# EAGLE board Project_Tsc v71 (EAGLE 9.7.0)
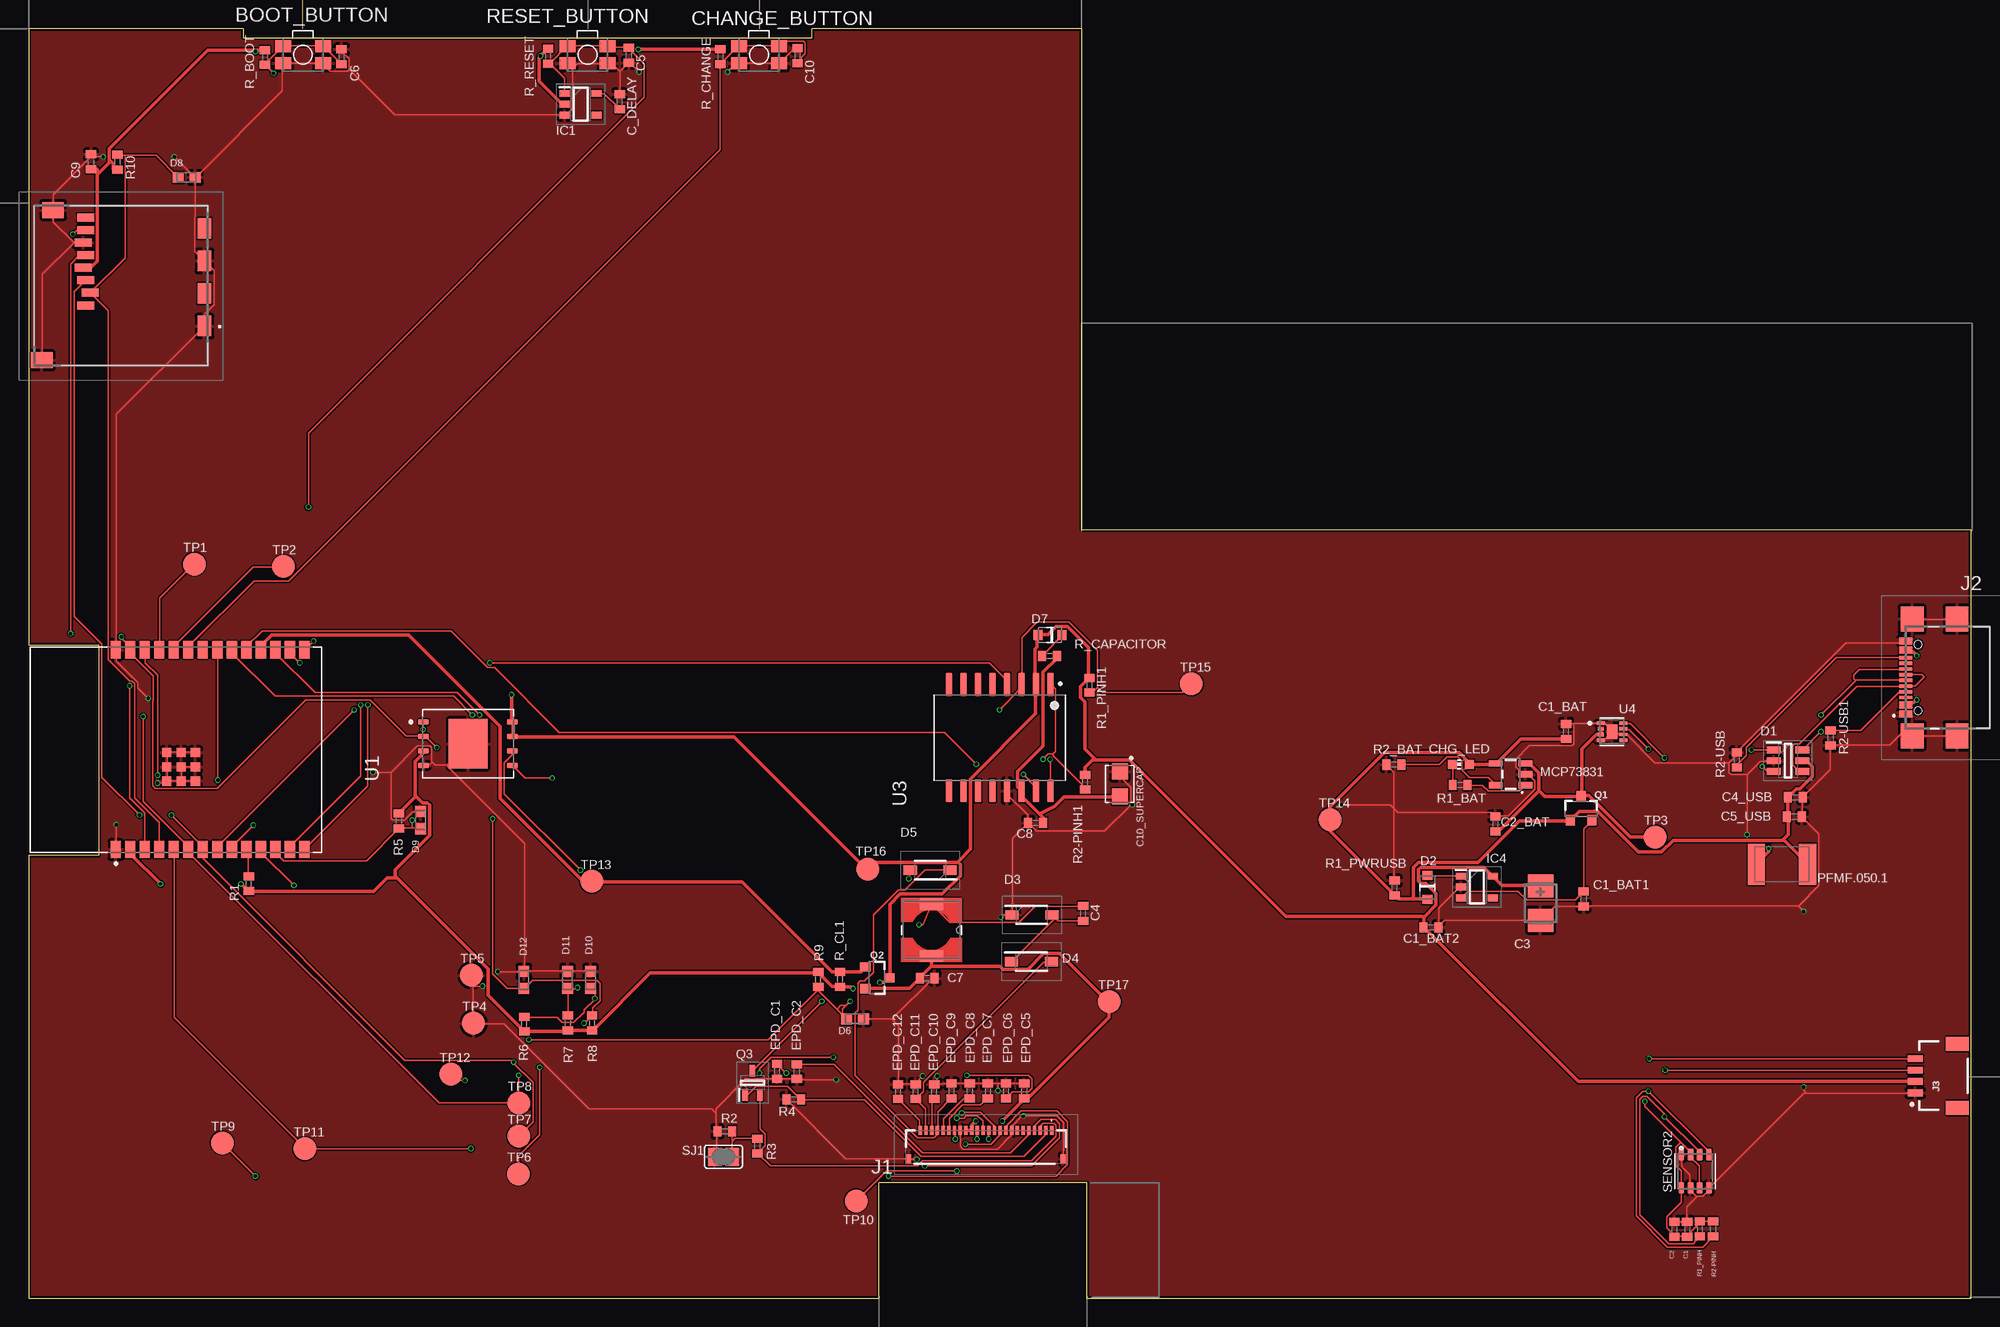
[diagram p0: board, top side]
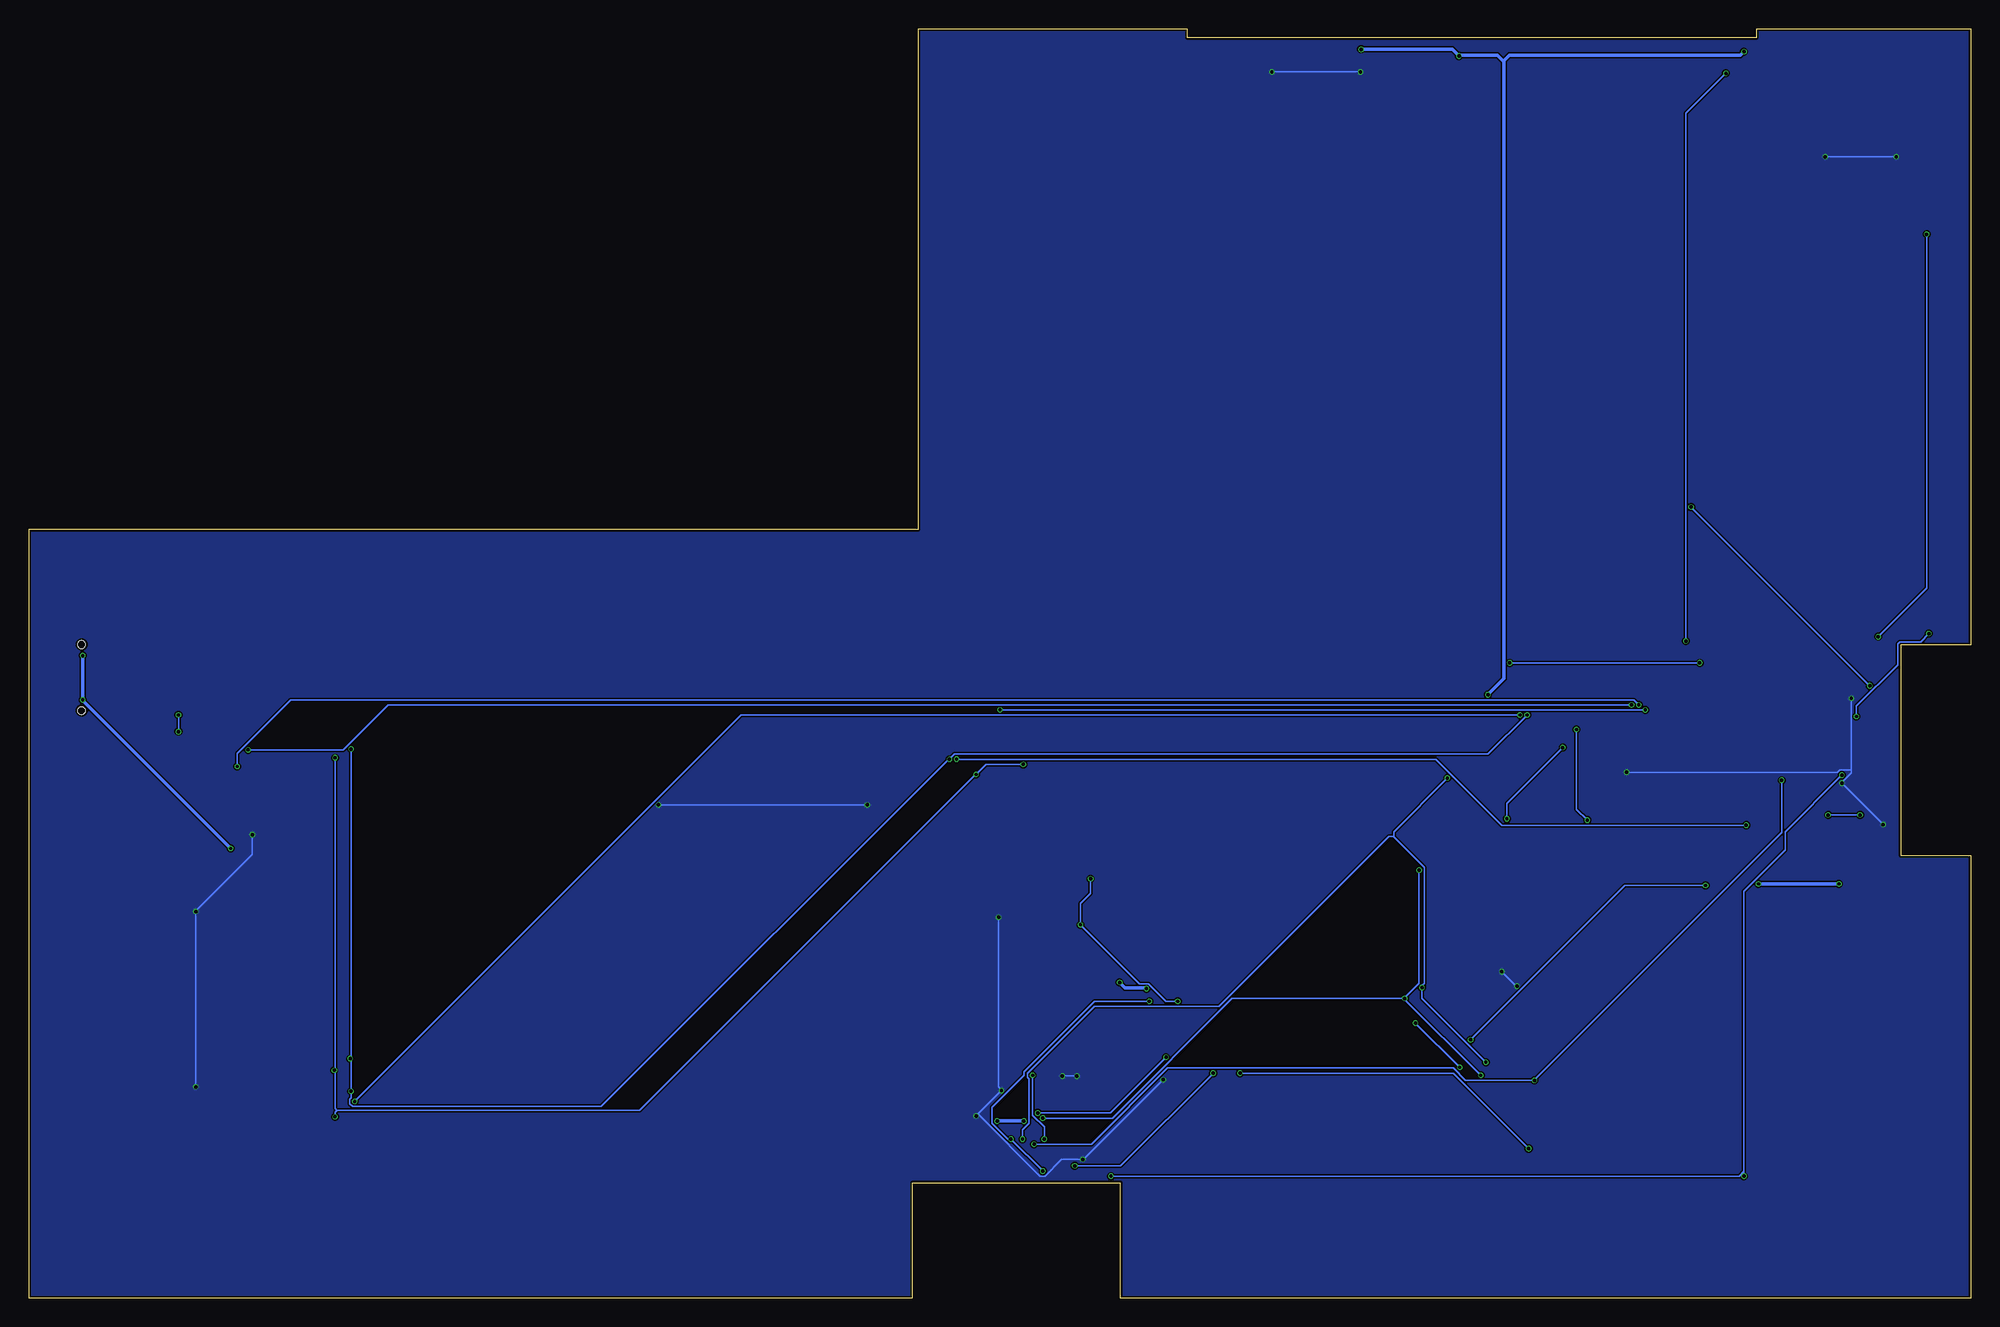
[diagram p1: board, bottom side, seen from below]

Size 170.1 x 111.2 mm. Coordinates in mm from the lower left corner, seen from the top.
Outline: 92.2,111.2 68.63,111.2 68.63,110.4 18.8,110.4 18.8,111.2 0,111.2 0,57.2 6.13,57.2 6.13,38.8 0,38.8 0,0 74.5,0 74.5,10.1 92.7,10.1 92.7,0 170.1,0 170.1,67.3 92.2,67.3 92.2,111.2
Copper layers (1*16): Top 0.035mm / dielectric 1.6mm / Bottom 0.035mm
Design rules "jlcpcb-2layers.dru": minimum track width 5mil, minimum drill 0.3mm, track to track 5mil, track to pad 5mil, pad to pad 5mil, via to via 5mil, smd to smd 5mil, copper to edge 0.2mm, drill to drill 6mil, minimum pad ring 10mil, minimum via ring 3mil, stop-mask expansion 4mil, vias tented up to drill 0mil, thermal gap 10mil
Net classes: 1 POWER: width 0.3 mm; 2 NORMAL: width 0.15 mm

## Footprints (pad centres in the part's own frame; a part is rotated, then mirrored left to right if it is on the bottom)
MYBUTTON = smd 1.4 x 1.05: 1 1.75,0.75; 2 -1.75,0.75; 3 -1.75,-0.75; 4 1.75,-0.75
EAGLE-LTSPICE_C0402 = smd 0.7 x 0.9: 1 -0.65,0; 2 0.65,0
ESP32_WROVER_EAGLE-LTSPICE_C0402 = smd 0.7 x 0.9: 1 -0.65,0; 2 0.65,0
RCL_CT3528 = smd 2 x 2.2: + -1.5,0; - 1.5,0
CAPCP3225X100N = smd 1.4 x 1.4: 1 -1.1,0; 2 1.1,0
ADAFRUIT_CHIP-LED0603 = smd 0.8 x 0.8: A 0,-0.75; C 0,0.75
SOT95P280X145-6N = smd 1.2 x 0.6: 1 -1.25,0.95; 2 -1.25,0; 3 -1.25,-0.95; 4 1.25,-0.95; 5 1.25,0; 6 1.25,0.95
ESP32_WROVER_AVX---SD0805S020S1R0_AVX_SD0805S020S1R0_0 = smd 0.8 x 0.9: 1 -1.05,0; 2 1.05,0
SOD3716X135N = smd 1.15 x 0.8: 1 -1.75,0; 2 1.75,0
DIOC1608X36N = smd 0.97 x 0.94: 1 -0.75,0; 2 0.75,0
SOT95P280X125-5N = smd 0.9 x 0.6: 1 -1.4,0.95; 2 -1.4,0; 3 -1.4,-0.95; 4 1.4,-0.95; 5 1.4,0.95
SOT95P280X120-5N = smd 0.9 x 0.6: 1 -1.4,0.95; 2 -1.4,0; 3 -1.4,-0.95; 4 1.4,-0.95; 5 1.4,0.95
FH34SRJ24S05SH99 = smd 0.3 x 0.8: 1 5.75,1.45; 2 5.25,1.45; 3 4.75,1.45; 4 4.25,1.45; 5 3.75,1.45; 6 3.25,1.45; 7 2.75,1.45; 8 2.25,1.45; 9 1.75,1.45; 10 1.25,1.45; 11 0.75,1.45; 12 0.25,1.45; 13 -0.25,1.45; 14 -0.75,1.45; 15 -1.25,1.45; 16 -1.75,1.45; 17 -2.25,1.45; 18 -2.75,1.45; 19 -3.25,1.45; 20 -3.75,1.45; 21 -4.25,1.45; 22 -4.75,1.45; 23 -5.25,1.45; 24 -5.75,1.45 | smd 0.4 x 0.8: MP1 6.75,-1.05; MP2 -6.75,-1.05
SAMACSYS_PARTS_USB4110GFA = smd 0.3 x 1.15: A1 -3.35,3.678; A4 -2.55,3.678; A5 -1.25,3.678; A6 -0.25,3.678; A7 0.25,3.678; A8 1.25,3.678; A9 2.55,3.678; A12 3.35,3.678; B1 3.05,3.678; B4 2.25,3.678; B5 1.75,3.678; B6 0.75,3.678; B7 -0.75,3.678; B8 -1.75,3.678; B9 -2.25,3.678; B12 -3.05,3.678 | smd 2.18 x 2: MP1 -5.11,-0.827; MP2 5.11,-0.827; MP3 -5.11,3.103; MP4 5.11,3.103 | hole 0.65: -2.89,2.603; 2.89,2.603
JST04_1MM_RA = smd 0.6 x 1.35: 1 -1.5,0; 2 -0.5,0; 3 0.5,0; 4 1.5,0 | smd 1.2 x 2: NC1 2.8,-3.675; NC2 -2.8,-3.675
112ATAARR03ATTEND = smd 1.8 x 1.2: G1 10.6,10.4; G2 4.9,10.4; S1 7.75,10.4; S2 2.05,10.4 | smd 1.4 x 1.9: G3 13.6,-3.85; G4 0.45,-2.85 | smd 0.7 x 1.5: P1 8.8,0; P2 7.7,0.4; P3 6.6,0; P4 5.5,-0.2; P5 4.4,0; P6 3.3,-0.2; P7 2.2,0; P8 1.1,0
IND_4828-WE-TPC_WRE = smd 1.016 x 2.032: 1 -2.286,0; 2 2.286,0
ESP32_WROVER_SPARKFUN-IC-POWER_SOT23-5 = smd 0.55 x 1.2: 1 -0.95,-1.3; 2 0,-1.3; 3 0.95,-1.3; 4 0.95,1.3; 5 -0.95,1.3
ESP32C6_VARISTOR_CT/CN1812 = smd 1.5 x 3.6: 1 -2.25,0; 2 2.25,0
ESP32_WROVER_SPARKFUN-DISCRETESEMI_SOT23-3 = smd 0.8 x 0.9: 1 -0.95,-1; 2 0.95,-1; 3 0,1.1
SOT65P210X110-3N = smd 1.05 x 0.5: 1 -1.05,0.65; 2 -1.05,-0.65; 3 1.05,0
ESP32_WROVER_EAGLE-LTSPICE_R0402 = smd 0.7 x 0.9: 1 -0.65,0; 2 0.65,0
ESP32_WROVER_BME680_PSON80P300X300X100-8N = smd 1.016 x 0.5: 1 1.458,1.2; 2 1.458,0.4; 3 1.458,-0.4; 4 1.458,-1.2; 5 -1.458,-1.22; 6 -1.458,-0.4; 7 -1.458,0.4; 8 -1.458,1.2
SJ = smd 1.168 x 1.6: 1 -0.762,0; 2 0.762,0
TP20R = smd 2 x 2: TP 0,0
SON127P600X800X80-9N = smd 0.94 x 0.44: 1 -3.895,1.905; 2 -3.895,0.635; 3 -3.895,-0.635; 4 -3.895,-1.905; 5 3.895,-1.905; 6 3.895,-0.635; 7 3.895,0.635; 8 3.895,1.905 | smd 3.4 x 4.3: 9 0,0
XCVR_ESP32-C6-WROOM-1-N8 = smd 1.5 x 0.9: 1 -8.75,5.26; 2 -8.75,3.99; 3 -8.75,2.72; 4 -8.75,1.45; 5 -8.75,0.18; 6 -8.75,-1.09; 7 -8.75,-2.36; 8 -8.75,-3.63; 9 -8.75,-4.9; 10 -8.75,-6.17; 11 -8.75,-7.44; 12 -8.75,-8.71; 13 -8.75,-9.98; 14 -8.75,-11.25; 15 8.75,-11.25; 16 8.75,-9.98; 17 8.75,-8.71; 18 8.75,-7.44; 19 8.75,-6.17; 20 8.75,-4.9; 21 8.75,-3.63; 22 8.75,-2.36; 23 8.75,-1.09; 24 8.75,0.18; 25 8.75,1.45; 26 8.75,2.72; 27 8.75,3.99; 28 8.75,5.26 | smd 0.8 x 0.8: 29_1 -2.755,0.79; 29_2 -1.505,0.79; 29_3 -0.255,0.79; 29_4 -2.755,-0.46; 29_5 -1.505,-0.46; 29_6 -0.255,-0.46; 29_7 -2.755,-1.71; 29_8 -1.505,-1.71; 29_9 -0.255,-1.71
SOIC127P1032X265-16N = smd 2.05 x 0.59: 1 -4.655,4.445; 2 -4.655,3.175; 3 -4.655,1.905; 4 -4.655,0.635; 5 -4.655,-0.635; 6 -4.655,-1.905; 7 -4.655,-3.175; 8 -4.655,-4.445; 9 4.655,-4.445; 10 4.655,-3.175; 11 4.655,-1.905; 12 4.655,-0.635; 13 4.655,0.635; 14 4.655,1.905; 15 4.655,3.175; 16 4.655,4.445
SON50P200X200X80-9N = smd 0.76 x 0.27: 1 -0.985,0.75; 4 -0.985,-0.75; 5 0.985,-0.75; 6 0.985,-0.25; 7 0.985,0.25; 8 0.985,0.75 | smd 0.61 x 0.305: 2 -0.985,0.25; 3 -0.985,-0.25 | smd 0.9 x 1.3: 9 0,0

## Placement (x,y rotation side)
BOOT_BUTTON  BUTTON_CUSYOMV1  [MYBUTTON]  24.03,108.91 180 top
C1  100nF  [EAGLE-LTSPICE_C0402]  145.25,6.03 90 top
C1_BAT  4.7uF  [ESP32_WROVER_EAGLE-LTSPICE_C0402]  134.64,49.65 90 top
C1_BAT1  4.7uF  [ESP32_WROVER_EAGLE-LTSPICE_C0402]  136.18,34.97 270 top
C1_BAT2  4.7uF  [ESP32_WROVER_EAGLE-LTSPICE_C0402]  122.82,32.47 0 top
C2  100nF  [EAGLE-LTSPICE_C0402]  144.13,6.03 90 top
C2_BAT  4.7uF  [ESP32_WROVER_EAGLE-LTSPICE_C0402]  128.45,41.55 90 top
C3  100uF TANT  [RCL_CT3528]  132.41,34.6 270 top
C4  4.7uF/25V  [ESP32_WROVER_EAGLE-LTSPICE_C0402]  92.35,33.69 90 top
C4_USB  100nF  [ESP32_WROVER_EAGLE-LTSPICE_C0402]  154.73,43.87 0 top
C5  1uF  [EAGLE-LTSPICE_C0402]  52.57,108.86 270 top
C5_USB  4.7uF  [ESP32_WROVER_EAGLE-LTSPICE_C0402]  154.64,42.17 0 top
C6  100nF  [EAGLE-LTSPICE_C0402]  27.41,108.73 90 top
C7  10uF  [EAGLE-LTSPICE_C0402]  78.7,28.03 0 top
C8  100nF  [ESP32_WROVER_EAGLE-LTSPICE_C0402]  88.19,41.63 180 top
C9  100nF  [EAGLE-LTSPICE_C0402]  5.47,99.53 90 top
C10  100nF  [EAGLE-LTSPICE_C0402]  67.35,108.83 90 top
C10_SUPERCAP  CPH3225A  [CAPCP3225X100N]  95.56,45.04 270 top
C_DELAY  100nF  [ESP32_WROVER_EAGLE-LTSPICE_C0402]  51.77,104.79 90 top
CHANGE_BUTTON  BUTTON_CUSYOMV1  [MYBUTTON]  63.96,108.91 180 top
CHG_LED  [ADAFRUIT_CHIP-LED0603]  125.44,46.75 90 top
D1  USBLC6-2SC6Y  [SOT95P280X145-6N]  154.08,47.07 0 top
D2  ESP32_WROVER_AVX---SD0805S020S1R0_AVX_SD0805S020S1R0_0_0AVX_SD0805S020S1R0_0_0  [ESP32_WROVER_AVX---SD0805S020S1R0_AVX_SD0805S020S1R0_0]  122.49,35.98 270 top
D3  MBR0530  [SOD3716X135N]  87.86,33.57 0 top
D4  MBR0530  [SOD3716X135N]  87.82,29.48 0 top
D5  MBR0530  [SOD3716X135N]  78.96,37.49 180 top
D6  PGB1010603MR  [DIOC1608X36N]  72.38,24.47 0 top
D7  ESP32_WROVER_AVX---SD0805S020S1R0_AVX_SD0805S020S1R0_0_0AVX_SD0805S020S1R0_0_0  [ESP32_WROVER_AVX---SD0805S020S1R0_AVX_SD0805S020S1R0_0]  89.44,58.08 180 top
D8  PGB1010603MR  [DIOC1608X36N]  13.86,98.17 0 top
D9  PGB1010603MR  [DIOC1608X36N]  34.34,41.87 90 top
D10  PGB1010603MR  [DIOC1608X36N]  49.22,27.87 90 top
D11  PGB1010603MR  [DIOC1608X36N]  47.2,27.87 90 top
D12  PGB1010603MR  [DIOC1608X36N]  43.38,27.87 90 top
EPD_C1  1uF/50V  [EAGLE-LTSPICE_C0402]  65.55,19.87 90 top
EPD_C2  1uF/50V  [EAGLE-LTSPICE_C0402]  67.28,19.85 90 top
EPD_C5  1uF/50V  [EAGLE-LTSPICE_C0402]  87.19,18.15 270 top
EPD_C6  1uF/50V  [EAGLE-LTSPICE_C0402]  85.6,18.15 270 top
EPD_C7  1uF/50V  [EAGLE-LTSPICE_C0402]  84.01,18.15 270 top
EPD_C8  1uF/50V  [EAGLE-LTSPICE_C0402]  82.42,18.15 270 top
EPD_C9  1uF/50V  [EAGLE-LTSPICE_C0402]  80.83,18.15 270 top
EPD_C10  1uF/50V  [EAGLE-LTSPICE_C0402]  79.31,18.09 270 top
EPD_C11  1uF/50V  [EAGLE-LTSPICE_C0402]  77.69,18.09 270 top
EPD_C12  1uF/50V  [EAGLE-LTSPICE_C0402]  76.15,18.09 270 top
IC1  BD5229G-TR  [SOT95P280X125-5N]  48.35,104.57 0 top
IC4  XC6220A331MR-G  [SOT95P280X120-5N]  126.83,36.02 0 top
J1  FH34SRJ-24S-0.5SH_99_  [FH34SRJ24S05SH99]  83.84,13.24 0 top
J2  SAMACSYS_PARTS_USB4110-GF-A  [SAMACSYS_PARTS_USB4110GFA]  168.06,54.36 90 top
J3  QWIIC_RIGHT_ANGLE  [JST04_1MM_RA]  165.22,19.48 90 top
J4  112A-TAAR-R03_ATTEND  [112ATAARR03ATTEND]  5,95.75 270 top
L1  68uH  [IND_4828-WE-TPC_WRE]  79.07,32.25 270 top
MCP73831  ESP32_WROVER_SPARKFUN-IC-POWER_MCP73831  [ESP32_WROVER_SPARKFUN-IC-POWER_SOT23-5]  129.78,45.89 90 top
PFMF.050.1  ESP32C6_VARISTORCN1812  [ESP32C6_VARISTOR_CT/CN1812]  153.54,38 0 top
Q1  20V/4.2A/52mΩ/1.4W  [ESP32_WROVER_SPARKFUN-DISCRETESEMI_SOT23-3]  135.96,42.86 0 top
Q2  20V/4.2A/52mΩ/1.4W  [ESP32_WROVER_SPARKFUN-DISCRETESEMI_SOT23-3]  74.28,28.06 270 top
Q3  SI1308EDL-T1-GE3  [SOT65P210X110-3N]  63.39,18.88 90 top
R1  10k  [ESP32_WROVER_EAGLE-LTSPICE_R0402]  19.29,36.31 270 top
R1_BAT  200  [ESP32_WROVER_EAGLE-LTSPICE_R0402]  125.36,44.95 0 top
R1_PINH  10K  [ESP32_WROVER_EAGLE-LTSPICE_R0402]  146.36,6.07 90 top
R1_PINH1  10K  [ESP32_WROVER_EAGLE-LTSPICE_R0402]  92.91,53.69 90 top
R1_PWRUSB  100K  [ESP32_WROVER_EAGLE-LTSPICE_R0402]  119.62,35.94 270 top
R2  2.2  [ESP32_WROVER_EAGLE-LTSPICE_R0402]  60.97,14.61 0 top
R2-PINH  10K  [ESP32_WROVER_EAGLE-LTSPICE_R0402]  147.52,6.07 90 top
R2-PINH1  10K  [ESP32_WROVER_EAGLE-LTSPICE_R0402]  92.53,45.19 90 top
R2-USB  5k1  [ESP32_WROVER_EAGLE-LTSPICE_R0402]  149.59,47.13 90 top
R2-USB1  5k1  [ESP32_WROVER_EAGLE-LTSPICE_R0402]  157.8,49.07 90 top
R2_BAT  2K  [ESP32_WROVER_EAGLE-LTSPICE_R0402]  119.58,46.73 0 top
R3  0.47  [ESP32_WROVER_EAGLE-LTSPICE_R0402]  63.82,13.33 270 top
R4  10K  [ESP32_WROVER_EAGLE-LTSPICE_R0402]  67.01,17.41 0 top
R5  10K  [ESP32_WROVER_EAGLE-LTSPICE_R0402]  32.43,41.81 90 top
R6  10k  [ESP32_WROVER_EAGLE-LTSPICE_R0402]  43.41,24.01 270 top
R7  10k  [ESP32_WROVER_EAGLE-LTSPICE_R0402]  47.23,24.11 270 top
R8  10k  [ESP32_WROVER_EAGLE-LTSPICE_R0402]  49.35,24.11 270 top
R9  10K  [ESP32_WROVER_EAGLE-LTSPICE_R0402]  69.15,27.91 90 top
R10  10K  [ESP32_WROVER_EAGLE-LTSPICE_R0402]  7.79,99.51 270 top
R_BOOT  10K  [ESP32_WROVER_EAGLE-LTSPICE_R0402]  20.71,108.67 90 top
R_CAPACITOR  15  [ESP32_WROVER_EAGLE-LTSPICE_R0402]  89.42,56.24 0 top
R_CHANGE  10k  [ESP32_WROVER_EAGLE-LTSPICE_R0402]  60.59,108.74 90 top
R_CL1  10K  [ESP32_WROVER_EAGLE-LTSPICE_R0402]  71.07,27.93 270 top
R_RESET  10K  [ESP32_WROVER_EAGLE-LTSPICE_R0402]  45.49,108.79 90 top
RESET_BUTTON  BUTTON_CUSYOMV1  [MYBUTTON]  48.95,108.91 180 top
SENSOR2  ESP32_WROVER_BME680_BME680  [ESP32_WROVER_BME680_PSON80P300X300X100-8N]  145.94,11.12 90 top
SJ1  [SJ]  60.86,12.39 0 top
TP1  TPTP20R  [TP20R]  14.51,64.29 0 top
TP2  TPTP20R  [TP20R]  22.33,64.09 0 top
TP3  TPTP20R  [TP20R]  142.45,40.39 0 top
TP4  TPTP20R  [TP20R]  38.97,24.09 0 top
TP5  TPTP20R  [TP20R]  38.79,28.29 0 top
TP6  TPTP20R  [TP20R]  42.91,10.89 0 top
TP7  TPTP20R  [TP20R]  42.93,14.19 0 top
TP8  TPTP20R  [TP20R]  42.95,17.09 0 top
TP9  TPTP20R  [TP20R]  16.97,13.59 0 top
TP10  TPTP20R  [TP20R]  72.48,8.51 0 top
TP11  TPTP20R  [TP20R]  24.19,13.09 0 top
TP12  TPTP20R  [TP20R]  36.97,19.61 0 top
TP13  TPTP20R  [TP20R]  49.32,36.51 0 top
TP14  TPTP20R  [TP20R]  113.97,41.91 0 top
TP15  TPTP20R  [TP20R]  101.82,53.81 0 top
TP16  TPTP20R  [TP20R]  73.49,37.59 0 top
TP17  TPTP20R  [TP20R]  94.64,25.99 0 top
U1  W25Q512JVEIQ  [SON127P600X800X80-9N]  38.49,48.56 0 top
U2  ESP32-C6-WROOM-1-N8  [XCVR_ESP32-C6-WROOM-1-N8]  12.9,48.04 90 top
U3  DS3231SN#  [SOIC127P1032X265-16N]  85.05,49.1 270 top
U4  MAX17048G+T10  [SON50P200X200X80-9N]  138.67,49.62 0 top

## Library data of the parts
BOOT_BUTTON CHANGE_BUTTON CHG_LED PFMF.050.1 RESET_BUTTON SJ1 TP1-TP17 = DeskAssistant v19 v1
C1 C1_BAT C1_BAT1 C1_BAT2 C2 C2_BAT C4 C4_USB C5 C5_USB C6-C10 C_DELAY EPD_C1 EPD_C2 EPD_C5-EPD_C12 = DeskAssistant v19 v1; SPICEMODEL: NONE; SPICEPREFIX: C
C3 = DeskAssistant v19 v1; SPICEPREFIX: C
C10_SUPERCAP = DeskAssistant v19 v1; AVAILABILITY: Not in stock; CHECK_PRICES: https://www.snapeda.com/parts/CPH3225A/Seiko+Instruments/view-part/?ref=eda; DESCRIPTION: 11 mF (EDLC) Supercapacitor 3.3 V 1210 (3225 Metric) - -; MF: Seiko Instruments; MP: CPH3225A; PACKAGE: 1210 Seiko; PRICE: None; PURCHASE-URL: https://www.snapeda.com/api/url_track_click_mouser/?unipart_id=562593&manufacturer=Seiko Instruments&part_name=CPH3225A&search_term=None; SNAPEDA_LINK: https://www.snapeda.com/parts/CPH3225A/Seiko+Instruments/view-part/?ref=snap
D1 = DeskAssistant v19 v1; AVAILABILITY: In Stock; CHECK_PRICES: https://www.snapeda.com/parts/USBLC6-2SC6Y/STMicroelectronics/view-part/?ref=eda; DESCRIPTION: 17V Clamp 5A (8/20µs) Ipp Tvs Diode Surface Mount SOT-23-6; MF: STMicroelectronics; MP: USBLC6-2SC6Y; PACKAGE: SOT-23-6 STMicroelectronics; PRICE: None; SNAPEDA_LINK: https://www.snapeda.com/parts/USBLC6-2SC6Y/STMicroelectronics/view-part/?ref=snap
D2 D7 = DeskAssistant v19 v1; CENTROID_NOT_SPECIFIED: No; DATASHEET: http://datasheets.avx.com/schottky.pdf; DIGIKEY_DESCRIPTION: DIODE SCHOTTKY 20V 1A 0805; DIGIKEY_PART_NUMBER: 478-7800-1-ND; LEAD_FREE: yes; MF: AVX; MOUSER_PART_NUMBER: 581-SD0805S020S1R0; PACKAGE: 0805 (2012 metric); PREFIX: D; ROHS: yes; TEMPERATURE_RANGE_HIGH: +125°C; TEMPERATURE_RANGE_LOW: -55°C
D3-D5 = DeskAssistant v19 v1; AVAILABILITY: In Stock; CHECK_PRICES: https://www.snapeda.com/parts/MBR0530/Onsemi/view-part/?ref=eda; DESCRIPTION: Diode Schottky 30 V 500mA Surface Mount SOD-123; MF: ON Semiconductor; MP: MBR0530; PACKAGE: SOD-123-2 ON Semiconductor; PRICE: None; PURCHASE-URL: https://www.snapeda.com/api/url_track_click_mouser/?unipart_id=179458&manufacturer=ON Semiconductor&part_name=MBR0530&search_term=None; SNAPEDA_LINK: https://www.snapeda.com/parts/MBR0530/Onsemi/view-part/?ref=snap
D6 D8-D12 = DeskAssistant v19 v1; AVAILABILITY: In Stock; CHECK_PRICES: https://www.snapeda.com/parts/PGB1010603MR/Littelfuse/view-part/?ref=eda; DESCRIPTION: 150V (Typ) Clamp - Ipp Tvs Diode Surface Mount 0603 (1608 Metric); MF: Littelfuse Inc.; MP: PGB1010603MR; PACKAGE: 0603 Littelfuse Inc.; PRICE: None; PURCHASE-URL: https://www.snapeda.com/api/url_track_click_mouser/?unipart_id=5659453&manufacturer=Littelfuse Inc.&part_name=PGB1010603MR&search_term=None; SNAPEDA_LINK: https://www.snapeda.com/parts/PGB1010603MR/Littelfuse/view-part/?ref=snap
IC1 = DeskAssistant v19 v1; DESCRIPTION: Voltage Detector with Adjustable Delay Time: CMOS processes are utilized to develop high precision, low current consumption CMOS reset ICs that allow arbitrary setting of the delay time. The extensive lineup includes both Nch Open Drain and CMOS output types in a wide range of detection voltages (from 2.3V to 6.0V, in 0.1V steps), enabling selection of the ideal solution based on customer requirements. In addition, the entire series is of course both lead-free and RoHS-compliant.; HEIGHT: 1.25mm; MANUFACTURER_NAME: ROHM Semiconductor; MANUFACTURER_PART_NUMBER: BD5229G-TR; MOUSER_PART_NUMBER: 755-BD5229G-TR; MOUSER_PRICE-STOCK: https://www.mouser.co.uk/ProductDetail/ROHM-Semiconductor/BD5229G-TR?qs=4kLU8WoGk0vvnhrrYwdszw%3D%3D
IC4 = DeskAssistant v19 v1; DESCRIPTION: LDO Voltage Regulators; HEIGHT: 1.2mm; MANUFACTURER_NAME: Torex; MANUFACTURER_PART_NUMBER: XC6220A331MR-G; MOUSER_PART_NUMBER: 865-XC6220A331MR-G; MOUSER_PRICE-STOCK: https://www.mouser.co.uk/ProductDetail/Torex-Semiconductor/XC6220A331MR-G?qs=AsjdqWjXhJ8ZSWznL1J0gg%3D%3D
J1 = DeskAssistant v19 v1; DESCRIPTION: 24 Position FFC, FPC Connector Contacts, Top and Bottom 0.020" (0.50mm) Surface Mount, Right Angle; HEIGHT: 1.1mm; MANUFACTURER_NAME: Hirose; MANUFACTURER_PART_NUMBER: FH34SRJ-24S-0.5SH(99); MOUSER_PART_NUMBER: 798-FH34SRJ24S05SH99; MOUSER_PRICE-STOCK: https://www.mouser.co.uk/ProductDetail/Hirose-Connector/FH34SRJ-24S-0.5SH99?qs=vcbW%252B4%252BSTIpKBl5ap9J8Fw%3D%3D
J2 = DeskAssistant v19 v1; DESCRIPTION: CONN USB 2.0 TYPE-C R/A SMT; HEIGHT: 3.26mm; MANUFACTURER_NAME: GCT (GLOBAL CONNECTOR TECHNOLOGY); MANUFACTURER_PART_NUMBER: USB4110-GF-A; MOUSER_PART_NUMBER: 640-USB4110-GF-A; MOUSER_PRICE-STOCK: https://www.mouser.co.uk/ProductDetail/GCT/USB4110-GF-A?qs=KUoIvG%2F9IlYiZvIXQjyJeA%3D%3D
J3 = DeskAssistant v19 v1; PROD_ID: CONN-13694
J4 = DeskAssistant v19 v1; DESCRIPTION: Micro SD Card Socket, Push-Push Type, Top Mount, SMT, H=1.83mm, 10u; HEIGHT: 1.9mm; MANUFACTURER_NAME: ATTEND; MANUFACTURER_PART_NUMBER: 112A-TAAR-R03 ATTEND
L1 = DeskAssistant v19 v1; COPYRIGHT: Copyright (C) 2024 Ultra Librarian. All rights reserved.; MANUFACTURER_PART_NUMBER: 744043680; MFR_NAME: Wurth Electronics
MCP73831 = DeskAssistant v19 v1; PROD_ID: IC-09995
Q1 Q2 = DeskAssistant v19 v1; PROD_ID: TRAN-14388
Q3 = DeskAssistant v19 v1; AVAILABILITY: In Stock; CHECK_PRICES: https://www.snapeda.com/parts/SI1308EDL-T1-GE3/Vishay+Siliconix/view-part/?ref=eda; DESCRIPTION: Si1308EDL-T1-GE3 N-channel MOSFET Transistor, 1.5 A, 30 V, 3-Pin SC-70 | Siliconix / Vishay SI1308EDL-T1-GE3; MF: Vishay Siliconix; MP: SI1308EDL-T1-GE3; PACKAGE: SOT-323 Vishay Semiconductor; PRICE: None; PURCHASE-URL: https://www.snapeda.com/api/url_track_click_mouser/?unipart_id=274603&manufacturer=Vishay Siliconix&part_name=SI1308EDL-T1-GE3&search_term=None; SNAPEDA_LINK: https://www.snapeda.com/parts/SI1308EDL-T1-GE3/Vishay+Siliconix/view-part/?ref=snap
R1 R1_BAT R1_PINH R1_PINH1 R1_PWRUSB R2 R2-PINH R2-PINH1 R2-USB R2-USB1 R2_BAT R3-R10 R_BOOT R_CAPACITOR R_CHANGE R_CL1 R_RESET = DeskAssistant v19 v1; SPICEMODEL: NONE; SPICEPREFIX: R
SENSOR2 = DeskAssistant v19 v1; AVAILABILITY: Unavailable; DESCRIPTION: Integrated Environmental Unit; MF: Bosch Sensortec; MP: BME680; PACKAGE: LGA-8 Bosch Tools; PRICE: None
U1 = DeskAssistant v19 v1; AVAILABILITY: In Stock; CHECK_PRICES: https://www.snapeda.com/parts/W25Q512JVEIQ/Winbond+Electronics/view-part/?ref=eda; DESCRIPTION: FLASH - NOR Memory IC 512Mb (64M x 8) SPI - Quad I/O 133 MHz 8-WSON (8x6); MF: Winbond Electronics; MP: W25Q512JVEIQ; PACKAGE: Package; PRICE: None; SNAPEDA_LINK: https://www.snapeda.com/parts/W25Q512JVEIQ/Winbond+Electronics/view-part/?ref=snap
U2 = DeskAssistant v19 v1; AVAILABILITY: In Stock; CHECK_PRICES: https://www.snapeda.com/parts/ESP32-C6-WROOM-1-N8/Espressif+Systems/view-part/?ref=eda; DESCRIPTION: Multiprotocol Modules ESP32-C6 module, Wi-Fi 6 in 2.4 GHz band, Bluetooth 5, Zigbee 3.0 and Thread. ESP34-WROOM Compatible - ENGINEERING SAMPLE; MF: Espressif Systems; MP: ESP32-C6-WROOM-1-N8; PACKAGE: None; PRICE: None; SNAPEDA_LINK: https://www.snapeda.com/parts/ESP32-C6-WROOM-1-N8/Espressif+Systems/view-part/?ref=snap
U3 = DeskAssistant v19 v1; AVAILABILITY: In Stock; CHECK_PRICES: https://www.snapeda.com/parts/DS3231SN%23/Analog+Devices/view-part/?ref=eda; DESCRIPTION: Extremely Accurate I²C-Integrated RTC/TCXO/Crystal; MF: Analog Devices; MP: DS3231SN#; PACKAGE: SOIC-16 Maxim; PRICE: None; PURCHASE-URL: https://www.snapeda.com/api/url_track_click_mouser/?unipart_id=99048&manufacturer=Analog Devices&part_name=DS3231SN#&search_term=None; SNAPEDA_LINK: https://www.snapeda.com/parts/DS3231SN%23/Analog+Devices/view-part/?ref=snap
U4 = DeskAssistant v19 v1; AVAILABILITY: In Stock; CHECK_PRICES: https://www.snapeda.com/parts/MAX17048G+T10/Analog+Devices/view-part/?ref=eda; DESCRIPTION: 3µA 1-Cell/2-Cell Fuel Gauge with ModelGauge; MF: Analog Devices; MP: MAX17048G+T10; PACKAGE: TDFN-8 Maxim; PRICE: None; PURCHASE-URL: https://www.snapeda.com/api/url_track_click_mouser/?unipart_id=329239&manufacturer=Analog Devices&part_name=MAX17048G+T10&search_term=None; SNAPEDA_LINK: https://www.snapeda.com/parts/MAX17048G+T10/Analog+Devices/view-part/?ref=snap

## Nets
3V3 [POWER]: C1_BAT2.1 C3.+ C9.1 D7.2 IC1.2 IC4.5 J3.2 J4.P4 Q2.3 R1.2 R1_PINH1.2 R2-PINH1.2 R5.2 R6.2 R7.2 R8.2 R9.2 R10.2 R_BOOT.2 R_CHANGE.2 R_CL1.2 R_RESET.2 TP16.TP U1.3 U1.7 U1.8 U2.2 U3.2
32KHZ [NORMAL]: R2-PINH1.1 U2.9 U3.1
DN [NORMAL]: D1.4 J2.A7 J2.B7
DP [NORMAL]: D1.6 J2.A6 J2.B6
EPD_3V3 [POWER]: C7.1 EPD_C5.2 J1.15 J1.16 L1.2 Q2.2 TP17.TP
EPD_3V3_C [POWER]: Q2.1 R_CL1.1 TP13.TP U2.18
EPD_BUSY [NORMAL]: J1.9 TP9.TP U2.26
EPD_CS [NORMAL]: D6.1 J1.12 R9.1 TP10.TP U2.11
EPD_DC [NORMAL]: J1.11 TP11.TP U2.5
EPD_RST [NORMAL]: J1.10 TP12.TP U2.21
FLASH_CS [NORMAL]: D9.1 R5.1 U1.1 U2.12
GDR [NORMAL]: J1.2 Q3.1 R4.2
GND [NORMAL]: BOOT_BUTTON.1 BOOT_BUTTON.2 C1.2 C1_BAT1.2 C1_BAT2.2 C1_BAT.2 C2.2 C2_BAT.2 C3.- C4_USB.2 C5.2 C5_USB.2 C6.2 C7.2 C8.2 C9.2 C10.2 C10_SUPERCAP.1 C_DELAY.2 CHANGE_BUTTON.1 CHANGE_BUTTON.2 D1.2 D3.1 D6.2 D8.2 D9.2 D10.2 D11.2 D12.2 EPD_C1.1 EPD_C2.1 EPD_C5.1 EPD_C6.1 EPD_C7.1 EPD_C8.1 EPD_C9.1 EPD_C10.1 EPD_C11.1 EPD_C12.1 IC1.3 IC4.2 J1.8 J1.17 J1.MP1 J1.MP2 J2.A1 J2.A12 J2.B1 J2.B12 J2.MP1 J2.MP2 J2.MP3 J2.MP4 J3.1 J4.G1 J4.G2 J4.G3 J4.G4 J4.P6 MCP73831.2 R1_PWRUSB.1 R2-USB1.1 R2-USB.2 R2.1 R2_BAT.1 R4.1 RESET_BUTTON.1 RESET_BUTTON.2 SENSOR2.1 SENSOR2.5 SENSOR2.7 SJ1.1 TP4.TP TP5.TP U1.4 U1.9 U2.1 U2.28 U2.29_1 U2.29_2 U2.29_3 U2.29_4 U2.29_5 U2.29_6 U2.29_7 U2.29_8 U2.29_9 U3.13 U4.1 U4.4 U4.6 U4.9
GPIO8 [NORMAL]: R1.1 U2.10
I2C_PW [NORMAL]: C1.1 C2.1 R1_PINH.2 R2-PINH.2 SENSOR2.2 SENSOR2.6 SENSOR2.8 U2.17
INT_RTC [NORMAL]: R1_PINH1.1 TP15.TP U2.8 U3.3
IO/BOOT [NORMAL]: BOOT_BUTTON.3 BOOT_BUTTON.4 C6.1 R_BOOT.1 U2.15
IO/CHANGE [NORMAL]: C10.1 CHANGE_BUTTON.3 CHANGE_BUTTON.4 R_CHANGE.1 U2.23
MISO [NORMAL]: D12.1 J4.P7 R8.1 TP6.TP U1.2 U2.27
MOSI [NORMAL]: D11.1 J1.14 J4.P3 R7.1 TP7.TP U1.5 U2.7
N$1 [NORMAL]: J2.A5 R2-USB1.2
N$3 [NORMAL]: J2.B5 R2-USB.1
N$6 [NORMAL]: C1_BAT1.1 D2.1 IC4.1 IC4.3 Q1.2
N$8 [NORMAL]: C4.1 D3.2 D4.1
N$10 [NORMAL]: EPD_C12.2 J1.24
N$12 [NORMAL]: MCP73831.1 R1_BAT.2
N$13 [NORMAL]: CHG_LED.C R1_BAT.1
N$14 [NORMAL]: MCP73831.5 R2_BAT.2
N$15 [NORMAL]: C_DELAY.1 IC1.5
N$16 [NORMAL]: EPD_C10.2 J1.22
N$18 [NORMAL]: EPD_C8.2 J1.20
N$19 [NORMAL]: EPD_C7.2 J1.19
N$20 [NORMAL]: EPD_C6.2 J1.18
N$23 [NORMAL]: D7.1 R_CAPACITOR.1
N$30 [NORMAL]: EPD_C2.2 J1.5
N$31 [NORMAL]: EPD_C1.2 J1.4
PREVGH [NORMAL]: D5.1 EPD_C9.2 J1.21
PREVGL [NORMAL]: D4.2 EPD_C11.2 J1.23
RESE [NORMAL]: J1.3 Q3.2 R3.2
RESE' [NORMAL]: R2.2 R3.1 SJ1.2
RESET [NORMAL]: C5.1 IC1.1 R_RESET.1 RESET_BUTTON.3 RESET_BUTTON.4 U2.3
RTC_RST [NORMAL]: U2.16 U3.4
RX [NORMAL]: TP2.TP U2.24
SCK [NORMAL]: D10.1 J1.13 J4.P5 R6.1 TP8.TP U1.6 U2.6
SCL [NORMAL]: J3.4 R2-PINH.1 SENSOR2.4 U2.20 U3.16 U4.7
SDA [NORMAL]: J3.3 R1_PINH.1 SENSOR2.3 U2.19 U3.15 U4.8
SRC [NORMAL]: C4.2 D5.2 L1.1 Q3.3
SS_SD [NORMAL]: D8.1 J4.P2 R10.1 U2.4
TX [NORMAL]: TP1.TP U2.25
USB_D+ [NORMAL]: D1.1 U2.14
USB_D- [NORMAL]: D1.3 U2.13
VBAT [POWER]: C2_BAT.1 MCP73831.3 Q1.3 TP3.TP U4.2 U4.3
VBUS [POWER]: C1_BAT.1 C4_USB.1 C5_USB.1 CHG_LED.A D1.5 D2.2 MCP73831.4 PFMF.050.1.2 Q1.1 R1_PWRUSB.2 TP14.TP
VRTC [POWER]: C8.1 C10_SUPERCAP.2 R_CAPACITOR.2 U3.14
VUSB [POWER]: J2.A4 J2.A9 J2.B4 J2.B9 PFMF.050.1.1

## Tracks (layer width: path | path; a pad name or v marks a point on that pad's centre or on a via)
3V3  (via drill 0.3)
  Top 0.3: R5.2 32.45,42.5 33.34,43.39 33.85,43.9 33.85,44.05 | U1.3 34.54,47.9 34.54,47.71 33.85,47.01 33.85,44.3 33.85,44.05 | v11.56,36.28 8.95,38.89 8.95,39.27 U2.2 | v18.61,36.28 19.18,35.71 R1.2 19.3,35.65 30.23,35.65 31.39,36.81 32.27,36.81 | 32.27,36.81 32.09,37 32.09,37.51 35.12,40.54 35.12,43.2 34.92,43.39 34.5,43.39 33.85,44.05 | 32.27,36.81 40.26,28.83 40.26,26.5 43.31,23.45 R6.2 43.43,23.39 47.12,23.39 47.18,23.45 R7.2 47.37,23.45 R8.2 49.47,23.52 54.42,28.47 69.03,28.47 R9.2 69.15,28.54 70.36,27.33 71.06,27.33 R_CL1.2 72.03,27.28 v72.2,27.11 | IC1.2 46.93,104.61 46.67,104.61 44.7,106.58 44.7,108.67 v44.83,108.8 45.47,109.43 R_RESET.2 | v53.4,109.37 60.58,109.37 R_CHANGE.2 | 6.03,98.49 6.1,98.49 7.05,99.44 7.05,99.7 | C9.1 5.52,98.89 6.03,98.89 6.03,98.49 | R10.2 7.75,98.89 7.4,98.89 7.4,99.35 7.05,99.7 | 19.88,109.31 15.68,109.31 7.05,100.67 7.05,99.7 | 19.88,109.31 20.7,109.31 R_BOOT.2 | 6.03,98.49 6.03,90.83 5.46,90.26 4.83,90.26 J4.P4 | v19.88,109.18 19.88,109.31 | 122.17,33.36 C1_BAT2.1 122.3,32.41 135.7,19.01 165.16,19.01 J3.2 | 122.17,33.36 123.25,34.44 123.25,35.46 122.36,36.35 121.92,36.35 121.73,36.54 121.73,37.55 121.92,37.74 127.44,37.74 128.21,36.98 IC4.5 128.33,36.85 129.03,36.16 132.4,36.16 C3.+ | R2-PINH1.2 92.52,45.87 92.52,46.5 93.16,47.14 93.4,47.14 | 81.41,38.19 81.6,38 81.6,36.98 80.01,35.39 76.33,35.39 75.44,34.5 75.44,28.09 Q2.3 75.25,28.03 74.87,27.65 v74.55,27.65 | 81.41,38.19 74.11,38.19 73.53,37.62 TP16.TP 73.34,37.62 61.78,49.17 42.55,49.17 U1.7 42.42,49.24 42.42,50.44 U1.8 42.29,50.57 v42.29,52.86 | 81.41,38.19 81.47,38.31 82.49,39.33 82.49,45.49 88.2,51.2 88.2,53.62 U3.2 88.2,53.81 88.14,53.87 88.14,56.86 88.33,57.05 88.33,58.06 D7.2 88.52,58.13 89.28,58.13 89.98,58.83 91,58.83 92.84,56.98 92.84,54.44 R1_PINH1.2 92.9,54.32 92.14,53.55 92.14,52.6 92.52,52.22 92.52,48.1 93.4,47.22 93.4,47.14
  Top 0.3: 93.4,47.14 96.39,47.14 110.11,33.42 122.05,33.42 122.17,33.36
  Bottom 0.3: v11.56,36.28 v18.61,36.28 | v53.4,109.37 45.4,109.37 v44.83,108.8 44.7,108.86 41.45,108.86 40.89,108.3 | v19.88,109.18 20.19,108.86 40.4,108.86 40.89,108.37 40.89,108.3 | 40.89,108.3 40.89,54.26 v42.29,52.86 | v72.2,27.11 72.28,27.19 74.09,27.19 v74.55,27.65
32KHZ  (via drill 0.3)
  Top 0.15: R2-PINH1.1 92.52,44.6 92.52,44.73 89.72,47.53 89.72,47.65 89.7,47.65 | U3.1 89.53,53.75 89.92,53.36 89.92,47.86 89.7,47.65 | v19.68,41.43 17.84,39.58 17.84,39.33 U2.9 | v88.84,47.2 89.28,47.65 89.7,47.65
  Bottom 0.15: v19.68,41.43 41.08,41.43 46.86,47.2 v88.84,47.2
DN
  Top 0.15: J2.B7 164.34,53.55 160.08,53.55 155.07,48.54 154.62,48.54 154.5,48.41 154.5,46.7 155.07,46.12 D1.4
  Top 0.152: J2.A7 165.79,54.61 166,54.4 165.21,53.61 J2.B7
DP  (via drill 0.3)
  Top 0.15: 159.96,54.13 164.34,54.13 J2.A6 | 159.96,54.13 159.83,54.25 159.83,54.57 160.34,55.08 164.34,55.08 J2.B6 | v156.97,49.62 155.38,48.03 D1.6 | v156.97,51.08 159.96,54.06 159.96,54.13
  Bottom 0.15: v156.97,51.08 v156.97,49.62
EPD_3V3  (via drill 0.3)
  Top 0.3: Q2.2 73.34,27.14 77.15,27.14 C7.1 78.11,28.15 79.06,29.11 | 79.06,29.11 79.06,29.93 L1.2 | J1.16 82.11,14.69 82.55,14.69 J1.15 82.61,14.82 82.61,15.2 v82.93,15.52 | v85.28,15.52 87.12,17.36 EPD_C5.2 87.25,17.55 87.57,17.55 94.61,24.6 94.61,25.93 TP17.TP 94.49,26 90.3,30.19 88.9,30.19 87.5,28.79 85.34,28.79 85.09,29.04 79.18,29.04 79.06,29.11
  Bottom 0.3: v85.28,15.52 v82.93,15.52
EPD_3V3_C
  Top 0.3: Q2.1 73.28,28.98 72.9,28.6 71.12,28.6 R_CL1.1 70.93,28.6 70.36,28.6 62.48,36.47 49.47,36.47 TP13.TP 49.28,36.54 48.51,36.54 41.27,43.78 41.27,50.06 33.27,58.06 21.27,58.06 20.38,57.17 20.38,56.79 U2.18
EPD_BUSY  (via drill 0.3)
  Top 0.15: v75.31,10.69 89.98,10.69 91,11.71 91,15.45 90.04,16.41 86.93,16.41 85.6,15.07 J1.9 | v19.88,10.69 17.02,13.55 TP9.TP | v11.3,45.81 11.3,54.57 10.22,55.65 10.22,56.73 U2.26
  Bottom 0.15: v75.31,10.69 20.28,10.69 19.88,11.1 19.88,35.65 16.26,39.27 16.26,40.85 v11.3,45.81
  Bottom 0.152: 19.88,11.1 v19.88,10.69
EPD_CS  (via drill 0.3)
  Top 0.15: v84.07,13.93 84.07,14.63 J1.12 | v81.28,11.14 75.12,11.14 72.52,8.53 TP10.TP | 71.3,24.8 D6.1 | 71.3,24.8 71.03,25.07 70.8,25.3 | 70.8,25.3 69.15,26.95 69.15,27.2 R9.1 69.09,26.95 64.77,22.63 v43.81,22.63 | v23.24,36.16 20.38,39.01 20.38,39.27 U2.11 | v71.94,26 71.58,25.62 | 70.8,25.3 71.12,25.62 71.58,25.62 | 71.58,25.62 71.3,25.35 71.3,24.8
  Bottom 0.15: v81.28,11.14 v84.07,13.93 84.33,13.93 85.72,15.33 85.72,16.72 82.93,19.52 82.93,19.84 76.77,26 v71.94,26 | v23.24,36.16 30.29,36.16 v43.81,22.63
EPD_DC  (via drill 0.3)
  Top 0.15: v81.72,16.22 81.79,16.28 83.38,16.28 84.58,15.07 J1.11 | v70.48,21.11 65.02,21.11 64.01,20.09 v64.01,19.71 | v38.73,13.1 24.19,13.1 TP11.TP 24.19,13.17 12.76,24.6 12.76,39.27 U2.5
  Bottom 0.15: v81.72,16.22 75.37,16.22 v70.48,21.11 | v64.01,19.71 45.34,19.71 v38.73,13.1
EPD_RST  (via drill 0.3)
  Top 0.15: J1.10 85.09,14.31 84.26,13.49 v82.04,13.49 | v38.23,19.07 37.53,19.07 37.02,19.58 TP12.TP | v16.57,45.36 16.57,56.73 U2.21
  Bottom 0.15: v82.04,13.49 77.03,13.49 70.36,20.15 45.34,20.15 44.26,19.07 v38.23,19.07 38.23,19.14 16.57,40.79 v16.57,45.36
FLASH_CS  (via drill 0.3)
  Top 0.15: 33.59,41.17 34.29,41.17 D9.1 | 33.59,41.17 32.45,41.17 R5.1 32.38,41.11 29.59,38.31 22.35,38.31 21.65,39.01 21.65,39.27 U2.12 | v34.54,49.81 34.54,50.44 U1.1 | 33.59,41.17 v33.59,41.87
  Bottom 0.15: v34.54,49.81 34.54,42.82 v33.59,41.87
GDR
  Top 0.15: J1.2 89.03,14.63 89.03,14.25 87.19,12.41 78.17,12.41 73.22,17.36 67.69,17.36 R4.2 67.63,17.42 66.48,18.57 63.69,18.57 62.99,17.87 62.8,17.87 Q3.1
GND  (via drill 0.3)
  Top 0.15: 119.57,42.9 119.57,46.06 118.94,46.7 R2_BAT.1 | 119.57,42.9 119.57,36.6 R1_PWRUSB.1 | J2.MP2 168.85,59.46 164.97,59.46 J2.MP4 164.91,59.46 164.4,58.95 164.4,57.75 J2.A12 164.4,57.68 164.4,57.43 J2.B1 164.34,57.36 159.13,57.36 149.61,47.84 R2-USB.2 149.54,47.78 149.54,47.52 148.91,46.89 | 148.91,46.89 148.91,46.06 149.1,45.87 150.5,45.87 | 150.5,45.87 151.64,47.01 152.78,47.01 D1.2 | U4.4 137.73,48.92 138.05,48.92 138.62,49.49 138.62,49.62 U4.9 | U4.9 138.62,49.43 139.64,49.43 U4.6 139.7,49.36 139.95,49.36 142.43,46.89 148.91,46.89 | U4.9 138.68,49.68 138.05,50.32 137.73,50.32 U4.1 137.67,50.32 135.32,50.32 | 135.32,50.32 134.68,50.32 C1_BAT.2 | 135.32,50.32 135.32,48.54 135.19,48.41 131.44,48.41 130.24,47.2 130.24,46.51 130.81,45.93 131.06,45.93 MCP73831.2 131.13,45.87 131.32,45.87 131.89,45.3 131.89,44.54 129.6,42.25 128.46,42.25 C2_BAT.2 128.09,42.55 119.92,42.55 119.57,42.9 | C2.2 144.15,6.69 145.22,6.69 C1.2 145.22,6.75 145.22,8.02 146.05,8.85 146.05,8.91 | 146.05,8.91 145.54,9.42 145.54,9.61 SENSOR2.7 145.48,9.68 145.48,10.82 144.78,11.52 144.78,12.53 SENSOR2.1 | 146.05,8.91 146.62,8.91 147.13,9.42 147.13,9.61 SENSOR2.5 147.19,9.68 155.45,17.93 155.7,17.93 | 155.7,17.93 165.16,17.93 J3.1 | 123.51,32.7 123.51,34.19 125.28,35.97 125.41,35.97 IC4.2 | 123.51,32.7 123.51,32.47 C1_BAT2.2 | J2.B12 164.4,51.27 164.4,51.02 J2.A1 164.4,50.95 164.4,49.81 164.91,49.3 J2.MP3 | J2.MP1 168.85,49.24 164.97,49.24 J2.MP3 | J2.MP3 164.34,49.81 163,48.47 157.86,48.47 R2-USB1.1 157.8,46.31 155.38,43.9 C4_USB.2 155.32,43.84 155.32,42.19 C5_USB.2 155.32,42.12 156.78,40.66 156.78,36.16 155,34.38
  Top 0.15: 155,34.38 136.21,34.38 C1_BAT1.2 136.14,34.31 133.67,34.31 132.46,33.11 C3.- 132.33,33.11 124,33.11 123.59,32.7 123.51,32.7 | v155.45,18.5 155.45,18.2 155.7,17.95 155.7,17.93 | v155.45,33.87 155,34.31 155,34.38 | v150.5,40.6 150.5,45.87 | C8.2 87.5,41.68 87.5,42.31 85.72,44.09 85.72,44.41 U3.13 | C8.2 87.5,41.62 86.17,40.28 86.17,33.62 D3.1 86.04,33.55 85.34,33.55 v85.15,33.36 | 96.52,43.2 96.52,44.73 95.57,45.68 95.57,46.12 C10_SUPERCAP.1 | 96.52,43.2 94.23,40.92 88.27,40.92 87.57,41.62 C8.2 | R4.1 66.42,17.36 71.56,12.22 77.09,12.22 J1.MP2 77.15,12.15 v77.79,12.15 | J1.17 81.6,14.63 81.6,13.29 81.85,13.04 84.84,13.04 86.04,14.25 86.04,14.63 J1.8 86.11,14.76 86.11,15.07 87,15.96 v87.12,15.96 90.04,15.96 90.61,15.39 90.61,12.22 J1.MP1 | 84.9,18.82 84.07,18.82 EPD_C7.1 83.95,18.82 82.49,18.82 EPD_C8.1 82.36,18.82 80.9,18.82 EPD_C9.1 80.77,18.76 79.31,18.76 EPD_C10.1 79.57,18.82 v79.57,19.45 | 84.9,18.82 85.6,18.82 EPD_C6.1 85.66,18.82 87.19,18.82 EPD_C5.1 | 75.63,24.47 79.18,28.03 79.31,28.03 C7.2 | 75.63,24.47 73.15,24.47 D6.2 | 75.63,24.47 75.63,24.41 76.2,23.84 76.2,18.82 EPD_C12.1 76.2,18.76 77.66,18.76 EPD_C11.1 77.66,18.82 v78.3,19.45 | 84.9,18.82 v84.9,18.18 | D12.2 43.43,28.66 47.18,28.66 D11.2 47.24,28.66 49.21,28.66 D10.2 | 36.64,46.7 35.6,46.7 35.6,46.71 35.31,47 | 36.64,46.7 38.48,48.54 U1.9 | U1.4 34.61,46.7 35.1,46.7 35.31,46.9 35.31,47 | 31.75,46.06 31.75,42 31.88,41.87 32.96,41.87 33.66,42.57 34.29,42.57 D9.2 | 31.75,46.06 34.04,48.35 35.18,48.35 35.31,48.22 35.31,47 | D12.2 43.43,28.73 43.43,39.84 36.64,46.63 36.64,46.7 | SJ1.1 60.13,12.41 60.26,12.53 60.26,14.56 R2.1 60.19,14.74 60.19,15.7 60.19,16.2 60.19,16.41 60.19,16.6 62.79,19.2 65.53,19.2 EPD_C1.1 65.6,19.2 67.25,19.2 EPD_C2.1 67.31,19.14 v70.74,19.14
  Top 0.15: 59.8,16.6 49.09,16.6 41.66,24.03 38.99,24.03 TP4.TP 38.92,24.09 38.92,28.15 TP5.TP 38.99,27.33 v39.75,27.33 | v41.08,28.6 43.31,28.6 D12.2 | C10.2 67.31,109.43 67.06,109.43 65.72,108.1 CHANGE_BUTTON.2 65.66,108.17 62.23,108.17 CHANGE_BUTTON.1 62.17,108.1 61.91,108.1 v61.21,107.4 | 51.82,107.47 51.82,105.5 C_DELAY.2 | 51.82,107.47 52.51,108.17 C5.2 52.64,108.23 v53.47,107.4 | 51.82,107.47 51.75,107.47 51.12,108.1 50.74,108.1 RESET_BUTTON.2 50.67,108.1 48.07,108.1 47.69,107.72 RESET_BUTTON.1 47.24,108.1 47.62,107.72 47.62,104.16 47.12,103.66 46.99,103.66 IC1.3 46.93,103.66 32.07,103.66 28.13,107.59 28.07,107.59 | U2.29_9 14.61,47.84 13.4,47.84 U2.29_6 13.34,47.84 12.13,47.84 U2.29_3 12.13,47.71 12.13,46.57 U2.29_2 12.13,46.51 12.13,45.3 U2.29_1 | U2.29_4 13.34,45.3 12.19,45.3 U2.29_1 | U2.29_7 13.4,45.3 U2.29_4 | U2.29_4 13.4,45.36 13.4,46.51 U2.29_5 13.46,46.51 14.61,46.51 U2.29_8 | v7.68,41.49 7.68,39.33 U2.1 | v11.3,45.11 11.94,45.11 12.06,45.24 U2.29_1 | 3.94,92.48 4.76,92.48 J4.P6 | 3.94,92.48 2.16,94.26 2.16,95.27 J4.G4 2.16,95.34 2.16,96.67 5.46,99.97 5.46,100.16 C9.2 5.52,99.97 v6.54,99.97 | J4.G3 1.21,82.19 1.21,89.69 3.94,92.42 3.94,92.48 | 28.07,107.59 28.07,108.55 27.43,109.18 27.43,109.37 C6.2 | 28.07,107.59 27.94,107.47 26.42,107.47 25.78,108.1 BOOT_BUTTON.2 25.72,108.17 BOOT_BUTTON.1 22.23,108.1 22.23,105.75 14.67,98.2 D8.2 | D8.2 14.61,98.13 14.61,94.7 14.54,94.64 14.54,91.72 15.37,90.89 J4.G2 15.43,90.83 16.26,90 16.26,87.02 15.43,86.19 15.43,85.18 J4.G1 15.37,85.11 7.68,77.43 7.68,56.86 U2.28 7.68,56.73 7.68,55.8 9.55,53.93 9.55,53.46 v10.48,52.54
  Top 0.15: v12.76,99.97 14.54,98.2 D8.2 | v30.16,46.06 31.75,46.06 | v114.94,43.2 119.27,43.2 119.57,42.9 | v96.65,43.2 96.52,43.2
  Top 0.152: 59.8,16.6 60.19,16.21 60.19,16.2
  Bottom 0.15: v155.45,18.5 v155.45,33.87 155.45,33.93 150.5,38.89 v150.5,40.6 | v78.3,19.45 v79.57,19.45 | v85.15,33.36 85.15,18.5 84.9,18.25 v84.9,18.18 v87.12,15.96 86.93,16.09 81.53,10.69 81.09,10.69 79.63,12.15 v77.79,12.15 77.72,12.15 v70.74,19.14 | v41.08,28.6 39.81,27.33 v39.75,27.33 | v53.47,107.4 v61.21,107.4 | v7.68,41.49 v11.3,45.11 11.3,45.17 10.48,46 10.48,46.25 | 10.48,46.25 v10.48,52.54 | v12.76,99.97 v6.54,99.97 | v30.16,46.06 11.68,46.06 11.49,46.25 10.48,46.25 | v96.65,43.2 v114.94,43.2
  pour Top: 6.2,38.76 6.18,38.74 6.15,38.72 0.08,38.72 0.08,0.08 74.42,0.08 74.42,10.12 74.44,10.14 74.46,10.16 74.48,10.18 92.72,10.18 92.74,10.16 92.76,10.14 92.78,10.12 92.78,0.08 170.02,0.08 170.02,67.22 92.18,67.22 92.16,67.24 92.14,67.26 92.12,67.28 92.12,111.12 68.71,111.12 68.71,110.38 68.69,110.36 68.67,110.34 68.64,110.32 18.78,110.32 18.76,110.34 18.74,110.36 18.72,110.38 18.72,111.12 0.08,111.12 0.08,57.28 6.15,57.28 6.18,57.26 6.2,57.24 6.21,57.22 6.21,38.78
  pour Bottom: 6.2,38.76 6.18,38.74 6.15,38.72 0.08,38.72 0.08,0.08 74.42,0.08 74.42,10.12 74.44,10.14 74.46,10.16 74.48,10.18 92.72,10.18 92.74,10.16 92.76,10.14 92.78,10.12 92.78,0.08 170.02,0.08 170.02,67.22 92.18,67.22 92.16,67.24 92.14,67.26 92.12,67.28 92.12,111.12 68.71,111.12 68.71,110.38 68.69,110.36 68.67,110.34 68.64,110.32 18.78,110.32 18.76,110.34 18.74,110.36 18.72,110.38 18.72,111.12 0.08,111.12 0.08,57.28 6.15,57.28 6.18,57.26 6.2,57.24 6.21,57.22 6.21,38.78
GPIO8
  Top 0.15: R1.1 19.24,36.98 19.24,39.14 19.11,39.27 U2.10
I2C_PW  (via drill 0.3)
  Top 0.15: R2-PINH.2 147.51,6.75 146.37,6.75 R1_PINH.2 146.3,6.69 146.3,6.56 145.22,5.48 C1.1 145.22,5.42 144.15,5.42 C2.1 144.15,5.48 143.45,6.18 143.45,7.14 144.72,8.41 144.72,9.61 SENSOR2.8 144.72,9.68 144.72,11.14 144.27,11.58 144.27,13.23 144.69,13.64 | SENSOR2.6 146.3,9.68 146.3,11.58 145.54,12.34 145.54,12.53 SENSOR2.2 145.48,12.6 145.48,12.85 144.69,13.64 | v39.5,51.08 37.53,53.05 25.08,53.05 21.65,56.48 21.65,56.73 U2.17 | v141.54,17.23 141.54,16.79 144.69,13.64
  Bottom 0.15: v39.5,51.08 107.7,51.08 v141.54,17.23
INT_RTC  (via drill 0.3)
  Top 0.15: R1_PINH1.1 92.96,53.05 93.2,53.05 93.2,53.1 93.6,53.5 | TP15.TP 101.79,53.81 101.03,53.05 94.05,53.05 93.6,53.5 | v28.51,51.52 16.57,39.58 16.57,39.33 U2.8 | v85.03,51.52 86.93,53.43 86.93,53.75 U3.3 87,53.81 87,57.87 88.33,59.21 91.12,59.21 93.6,56.73 93.6,53.5
  Bottom 0.15: v85.03,51.52 v28.51,51.52
IO/BOOT  (via drill 0.3)
  Top 0.15: C6.1 27.37,108.1 25.78,109.69 BOOT_BUTTON.3 25.72,109.69 22.29,109.69 BOOT_BUTTON.4 22.23,109.62 20.77,108.17 20.77,108.04 R_BOOT.1 20.77,107.97 v21.46,107.28 | v24.96,57.55 24.19,56.79 U2.15
  Bottom 0.15: v24.96,57.55 24.96,103.78 v21.46,107.28
IO/CHANGE
  Top 0.15: C10.1 67.37,108.23 67.37,108.36 68.01,108.99 68.01,109.94 67.88,110.07 66.1,110.07 65.72,109.69 CHANGE_BUTTON.3 65.66,109.69 62.23,109.69 CHANGE_BUTTON.4 62.17,109.69 60.59,108.11 R_CHANGE.1 60.58,108.04 60.58,100.61 22.8,62.83 19.75,62.83 14.03,57.11 14.03,56.79 U2.23
MISO  (via drill 0.3)
  Top 0.15: v44.77,20.22 44.77,14.31 42.93,12.47 42.93,10.95 TP6.TP | v48.64,24.09 49.34,24.79 R8.1 49.4,24.79 49.4,25.42 50.04,26.06 50.04,27.58 49.78,27.84 44.13,27.84 43.43,27.14 D12.1 43.31,27.14 41.91,27.14 40.64,28.41 v40.64,42 | v3.87,93.18 4.19,93.5 4.95,93.5 J4.P7 | v8.13,57.94 8.13,57.81 8.89,57.05 8.89,56.86 U2.27 8.95,56.73 8.95,56.48 10.92,54.51 10.92,52.35 10.86,52.28 10.86,44.92 11.11,44.67 16.51,44.67 24.26,52.41 29.91,52.41 33.08,49.24 34.54,49.24 U1.2 34.67,49.17 34.8,49.17 v35.75,48.22
  Bottom 0.15: v48.64,24.09 v44.77,20.22 | v3.87,93.18 3.87,62.19 v8.13,57.94 | v40.64,42 40.64,43.33 v35.75,48.22
MOSI  (via drill 0.3)
  Top 0.15: R7.1 47.24,24.79 47.24,27.07 D11.1 47.31,27.07 47.94,27.07 v48.07,27.2 | v83.06,13.93 83.06,14.63 J1.14 | v45.85,45.55 43.5,45.55 42.42,46.63 U1.5 | 42.45,20.63 44.2,18.88 44.2,15.45 42.99,14.25 TP7.TP | 42.45,20.63 42.23,20.85 32.96,20.85 15.3,38.5 15.3,39.27 U2.7 15.24,39.33 15.24,39.58 v12.51,42.31 | J4.P3 4.95,89.12 4,88.16 4,59.72 6.41,57.31 6.41,45.62 v9.72,42.31 | v42.48,20.66 42.45,20.63
  Bottom 0.15: v83.06,13.93 83.06,14.76 82.49,15.33 82.49,19.2 82.61,19.33 82.61,19.71 76.77,25.55 65.85,25.55 50.95,40.45 50.59,40.45 50.55,40.41 | v45.85,45.55 50.55,40.85 50.55,40.41 | 50.55,40.41 47.88,37.74 47.88,27.58 48.07,27.39 v48.07,27.2 48.07,26.25 v42.48,20.66 | v9.72,42.31 v12.51,42.31
N$1
  Top 0.15: J2.A5 163.83,53.11 160.46,49.74 157.86,49.74 R2-USB1.2
N$3
  Top 0.15: R2-USB.1 149.61,46.51 149.61,46.7 150.43,47.52 150.43,48.22 158.31,56.09 164.34,56.09 J2.B5
N$6
  Top 0.15: 126.11,35.65 125.92,35.46 125.86,35.46 125.48,35.08 IC4.3 | 126.11,35.65 126.11,36.41 125.6,36.92 125.48,36.92 IC4.1 125.41,36.98 122.49,36.98 D2.1 | Q1.2 136.91,41.81 136.21,41.11 136.21,35.65 C1_BAT1.1 135.45,34.89 131.19,34.89 130.43,35.65 126.11,35.65
N$8
  Top 0.15: 89.92,33.3 89.66,33.55 D3.2 89.92,33.3 | 89.92,33.3 90.17,33.04 92.33,33.04 C4.1 | 89.92,33.3 86.11,29.49 D4.1
N$10
  Top 0.15: J1.24 78.04,14.69 78.04,15.58 76.2,17.42 EPD_C12.2
N$12
  Top 0.15: R1_BAT.2 126.05,44.92 127.32,44.92 127.83,44.41 130.56,44.41 131.06,44.92 MCP73831.1
N$13
  Top 0.15: CHG_LED.C 124.71,46.7 124.71,44.98 R1_BAT.1
N$14
  Top 0.15: R2_BAT.2 120.27,46.76 123.57,46.76 124.21,47.39 125.16,47.39 125.54,47.01 125.54,46.25 126.17,45.62 127.83,45.62 128.46,44.98 MCP73831.5
N$15
  Top 0.15: IC1.5 49.78,105.5 50.42,105.5 51.75,104.16 C_DELAY.1
N$16
  Top 0.15: J1.22 79.12,14.69 79.12,17.3 79.25,17.42 EPD_C10.2
N$18
  Top 0.15: J1.20 80.14,14.69 80.14,15.71 81.92,17.49 82.36,17.49 EPD_C8.2
N$19
  Top 0.15: J1.19 80.64,14.69 80.64,15.77 81.79,16.91 83.38,16.91 83.95,17.49 EPD_C7.2
N$20  (via drill 0.3)
  Top 0.15: v81.15,13.93 81.15,14.63 J1.18 | v82.17,19.52 87.57,19.52 87.88,19.2 87.88,18.38 87.57,18.06 86.17,18.06 85.66,17.55 EPD_C6.2
  Bottom 0.15: v81.15,13.93 81.15,15.01 82.17,16.03 v82.17,19.52
N$23
  Top 0.15: R_CAPACITOR.1 88.77,56.28 90.55,58.06 D7.1
N$30
  Top 0.15: J1.5 87.57,14.63 87.57,14.31 85.98,12.72 78.3,12.72 70.55,20.47 67.31,20.47 EPD_C2.2
N$31  (via drill 0.3)
  Top 0.15: v78.49,11.58 87.82,11.58 90.3,14.06 90.3,15.26 89.92,15.64 88.65,15.64 88.14,15.14 88.14,14.69 J1.4 | v66.36,19.71 65.6,20.47 EPD_C1.2
  Bottom 0.15: v78.49,11.58 74.49,11.58 v66.36,19.71
PREVGH
  Top 0.15: EPD_C9.2 80.77,17.49 79.63,16.34 79.63,14.69 J1.21 79.57,14.63 79.57,14.31 79.31,14.06 77.85,14.06 72.39,19.52 72.39,24.98 72.63,25.22 72.63,27.59 72.81,27.77 73.22,27.77 73.98,28.54 73.98,33.55 76.2,35.77 76.77,35.77 78.49,37.49 D5.1
PREVGL
  Top 0.15: J1.23 78.55,14.69 78.55,16.6 77.72,17.42 EPD_C11.2 77.72,17.49 78.36,18.12 78.36,18.88 88.9,29.42 89.53,29.42 D4.2
RESE
  Top 0.15: J1.3 88.65,14.69 88.65,15.14 88.84,15.33 89.79,15.33 89.98,15.14 89.98,14.18 87.82,12.03 78.3,12.03 77.85,11.58 64.96,11.58 63.88,12.66 R3.2 63.88,12.72 64.52,13.36 64.52,14.38 64.07,14.82 64.07,17.8 Q3.2
RESE'
  Top 0.15: 61.59,13.7 61.59,12.41 SJ1.2 | 61.59,13.7 61.59,13.99 61.59,14.56 R2.2 | R3.1 63.82,13.99 62,13.99 61.89,13.99 61.59,13.7
RESET  (via drill 0.3)
  Top 0.15: IC1.1 46.93,105.56 46.93,106.83 45.66,108.1 R_RESET.1 45.53,108.17 45.66,108.17 47.18,109.69 RESET_BUTTON.4 47.24,109.69 50.67,109.69 RESET_BUTTON.3 50.74,109.62 50.8,109.56 52.51,109.56 C5.1 52.58,109.43 53.91,108.1 53.91,105.18 24.51,75.78 v24.51,69.3 | U2.3 10.16,39.33 10.16,42.5 8.85,43.82 v8.85,53.64
  Bottom 0.15: v24.51,69.3 v8.85,53.64
RTC_RST  (via drill 0.3)
  Top 0.15: v23.75,55.65 22.92,56.48 22.92,56.73 U2.16 | U3.4 85.66,53.81 85.66,54.13 84.14,55.65 v40.39,55.65
  Bottom 0.15: v23.75,55.65 v40.39,55.65
RX
  Top 0.15: U2.24 12.76,56.79 12.76,57.11 19.68,64.03 22.29,64.03 TP2.TP
SCK  (via drill 0.3)
  Top 0.15: v81.28,15.77 81.92,15.77 82.11,15.96 83.12,15.96 83.57,15.52 83.57,14.69 J1.13 | D10.1 49.28,27.07 49.59,26.76 v49.59,26.25 49.59,26.19 48.64,25.23 48.64,25.04 47.75,24.15 46.74,24.15 46.29,24.6 43.43,24.6 R6.1 | v48.32,37.49 41.66,44.16 41.66,46.89 42.35,47.59 42.35,47.9 U1.6 | v3.68,58.2 3.68,90.58 4.45,91.34 4.95,91.34 J4.P5 | v10.03,50.95 10.03,43.52 13.97,39.58 13.97,39.33 U2.6 14.03,39.27 14.03,39.01 35.94,17.11 42.93,17.11 TP8.TP 42.93,17.17 v42.93,19.52
  Bottom 0.15: v81.28,15.77 75.18,15.77 64.71,26.25 v49.59,26.25 | v48.32,37.49 48.32,27.58 49.59,26.31 v49.59,26.25 | v10.03,50.95 10.03,51.85 6.41,55.48 6.41,57.31 6.25,57.47 4.41,57.47 v3.68,58.2 | v42.93,19.52 49.59,26.19 v49.59,26.25
SCL  (via drill 0.3)
  Top 0.15: v141.86,48.09 140.14,49.81 139.7,49.81 U4.7 | SENSOR2.4 147.13,12.6 147.13,12.85 v141.86,18.12 141.35,18.12 140.78,17.55 140.78,7.2 143.51,4.47 146.62,4.47 147.51,5.36 R2-PINH.1 | v141.92,20.98 165.16,20.98 J3.4 | v38.86,51.08 37.21,52.73 21.59,52.73 17.84,56.48 17.84,56.73 U2.20 | U3.16 89.47,44.47 89.47,47.17 v89.45,47.19
  Bottom 0.15: 141.86,20.98 v141.86,18.12 141.86,17.55 141.99,17.42 141.99,17.04 141.73,16.79 119.95,16.79 89.53,47.2 89.47,47.2 | 141.86,20.98 v141.86,48.09 | v141.92,20.98 141.86,20.98 | v38.86,51.08 42.29,47.65 89.03,47.65 89.47,47.2 | 89.47,47.2 v89.45,47.19
SDA  (via drill 0.3)
  Top 0.15: v143.26,47.33 140.27,50.32 139.7,50.32 U4.8 | SENSOR2.3 146.3,12.6 146.3,12.85 v143.26,15.9 143.26,16.15 141.73,17.68 141.35,17.68 141.1,17.42 141.1,7.33 143.64,4.79 145.8,4.79 145.92,4.91 145.92,4.98 146.3,5.36 R1_PINH.1 | v143.32,19.96 165.16,19.96 J3.3 | v83,46.76 80.2,49.55 46.48,49.55 40.81,55.22 40.21,55.22 36.99,58.44 20.45,58.44 19.11,57.11 19.11,56.79 U2.19 | v87.12,45.87 88.2,44.79 88.2,44.47 U3.15
  Bottom 0.15: v143.26,15.9 143.26,16.3 143.09,16.47 | 143.26,19.96 143.26,16.63 143.1,16.47 143.09,16.47 | 143.26,19.96 v143.26,47.33 | v143.32,19.96 143.26,19.96 | v83,46.76 86.23,46.76 v87.12,45.87 87.19,45.87 116.59,16.47 143,16.47 143.09,16.47
SRC  (via drill 0.3)
  Top 0.15: C4.2 92.33,34.31 88.14,34.31 86.74,32.92 80.71,32.92 79.12,34.5 L1.1 78.34,32.7 v77.98,32.7 | v69.47,26 63.44,19.96 Q3.3 | v77.09,36.73 77.15,36.79 77.15,37.49 D5.2
  Bottom 0.15: v77.09,36.73 77.09,35.46 77.98,34.57 v77.98,32.7 72.81,27.54 72.02,27.54 70.48,26 v69.47,26
SS_SD
  Top 0.15: 8.45,100.1 11.18,100.1 13.08,98.2 D8.1 | 8.45,100.1 7.81,100.1 R10.1 | 8.45,100.1 8.45,91.08 5.46,88.1 J4.P2 5.46,88.03 6.99,86.51 6.99,55.96 8.88,54.07 9.03,54.07 9.28,53.82 9.28,43.83 11.43,41.68 11.43,39.33 U2.4
TX
  Top 0.15: U2.25 11.49,56.79 11.49,61.3 14.48,64.29 TP1.TP
USB_D+  (via drill 0.3)
  Top 0.15: v150.88,48.03 152.78,48.03 D1.1 | v29.72,51.97 29.72,44.86 24.19,39.33 U2.14
  Bottom 0.15: v150.88,48.03 142.56,48.03 138.62,51.97 v29.72,51.97
USB_D-  (via drill 0.3)
  Top 0.15: v151.83,46.57 152.27,46.12 152.78,46.12 D1.3 | v29.08,51.97 29.08,45.74 22.92,39.58 22.92,39.33 U2.13
  Bottom 0.15: v151.83,46.57 151.83,47.71 147.13,52.41 29.53,52.41 v29.08,51.97
VBAT
  Top 0.3: U4.2 137.73,49.81 137.73,49.43 U4.3 137.54,49.36 137.29,49.36 136.02,48.09 136.02,44.09 Q1.3 | 132.27,44.41 128.78,40.92 128.46,40.92 C2_BAT.1 | 132.27,44.41 132.27,46 131.44,46.82 131.13,46.82 MCP73831.3 | Q1.3 132.78,43.97 132.4,44.35 132.27,44.41 | TP3.TP 142.43,40.41 140.27,40.41 136.65,44.03 136.14,44.03 Q1.3
VBUS
  Top 0.3: D1.5 155.38,47.01 155.77,47.01 156.21,46.57 156.21,45.68 155.13,44.6 154.81,44.6 154.18,43.97 C4_USB.1 154.05,43.84 154.05,42.19 C5_USB.1 154.11,42.06 154.11,40.61 153.6,40.09 | PFMF.050.1.2 155.77,38.06 153.73,40.09 153.6,40.09 | C1_BAT.1 134.62,48.98 130.68,48.98 128.59,46.89 MCP73831.4 128.46,46.82 128.4,46.76 126.24,46.76 CHG_LED.A 126.17,46.89 125.28,47.78 118.75,47.78 113.98,43.01 113.98,42.06 TP14.TP 113.98,41.87 113.98,40.92 119.51,35.39 R1_PWRUSB.2 119.63,35.27 119.95,34.95 121.28,34.95 | 121.28,34.95 122.43,34.95 D2.2 | 121.28,34.95 121.28,37.74 121.73,38.19 126.94,38.19 130.56,41.81 135,41.81 Q1.1 135.13,41.93 135.83,42.63 137.41,42.63 140.97,39.08 143,39.08 144.02,40.09 153.6,40.09
VRTC
  Top 0.3: 88.54,42.42 87,43.97 87,44.41 U3.14 86.87,44.54 86.61,44.79 86.61,46.12 88.84,48.35 88.84,54.82 90.04,56.03 90.04,56.22 R_CAPACITOR.2 | 88.54,42.42 88.84,42.12 88.84,41.68 C8.1 | C10_SUPERCAP.2 95.5,43.9 90.68,43.9 89.86,43.09 88.54,42.42
VUSB  (via drill 0.3)
  Top 0.3: J2.A4 164.4,51.84 164.4,52.09 J2.B9 164.53,52.16 165.1,52.16 v165.35,52.41 | J2.A9 164.4,56.86 164.4,56.67 J2.B4 164.53,56.6 165.04,56.6 v165.35,56.28 | v152.4,39.39 152.4,39.14 151.32,38.06 PFMF.050.1.1
  Bottom 0.3: v165.35,56.28 v165.35,52.41 165.29,52.28 v152.4,39.39